# Altium PCB MJE13001_SWITCHING_WITH_FEEDBACK_V2.PcbDoc
Units mil, origin at the board's own origin, x right, y up, seen from the top; angles counter-clockwise.
Board outline 2175 x 1150 mil, 2 copper layers (Top Layer, Bottom Layer); 21 components, 14 nets, 45 pads, 0 vias.
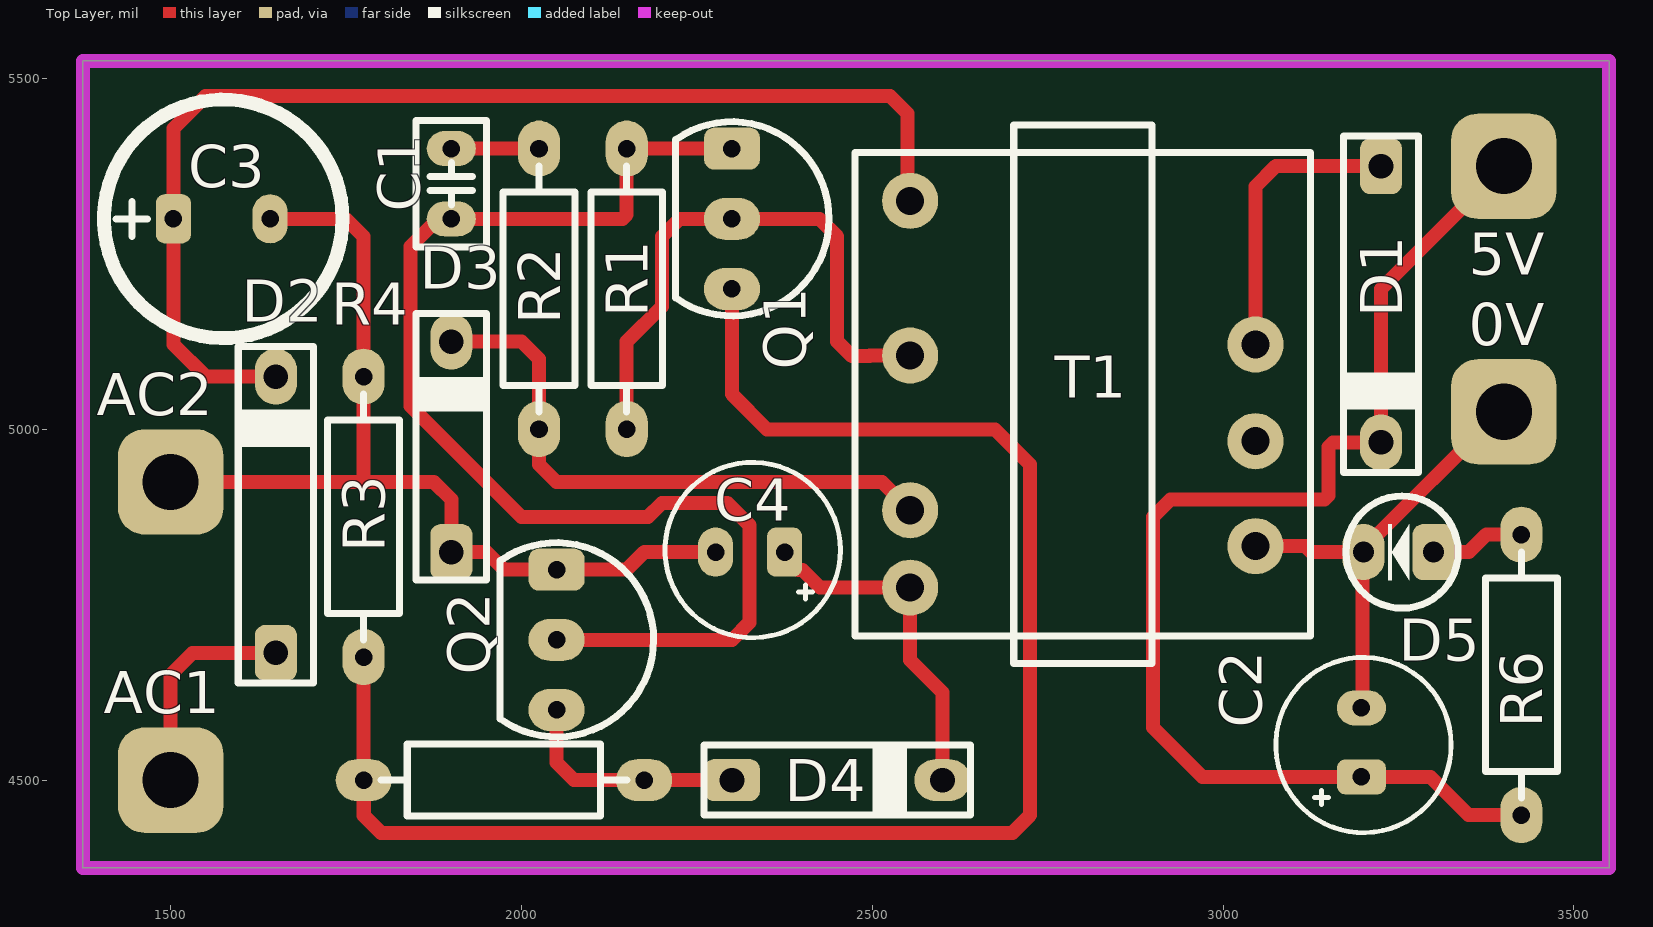
[diagram p0: Top Layer view]
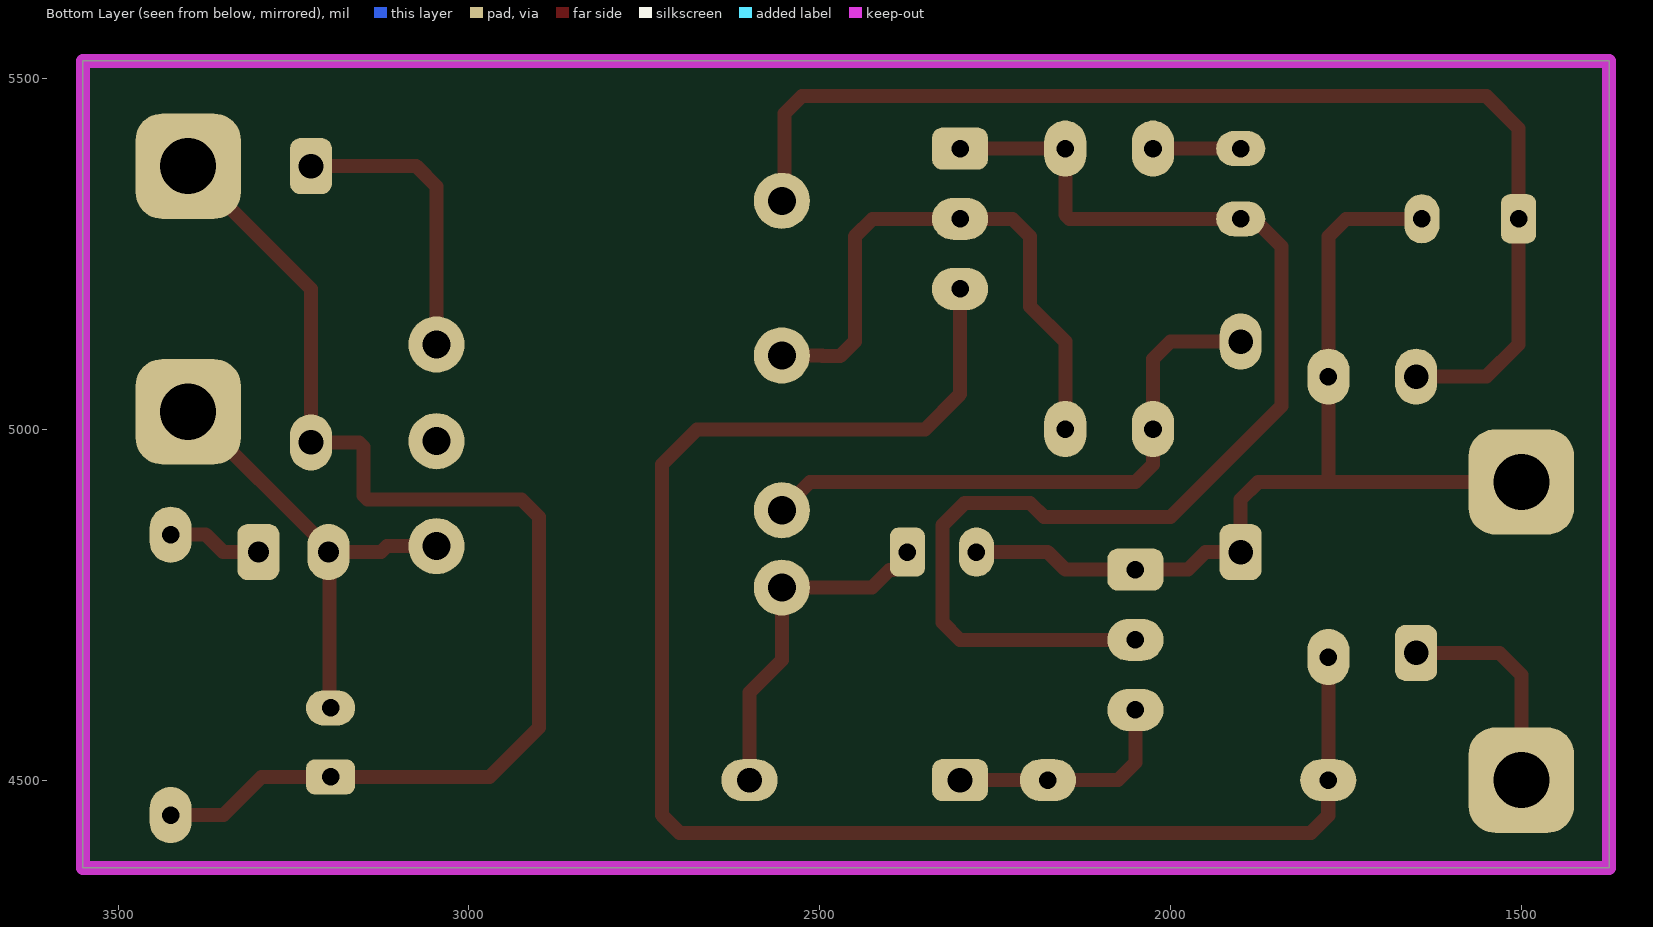
[diagram p1: Bottom Layer view, seen from below]
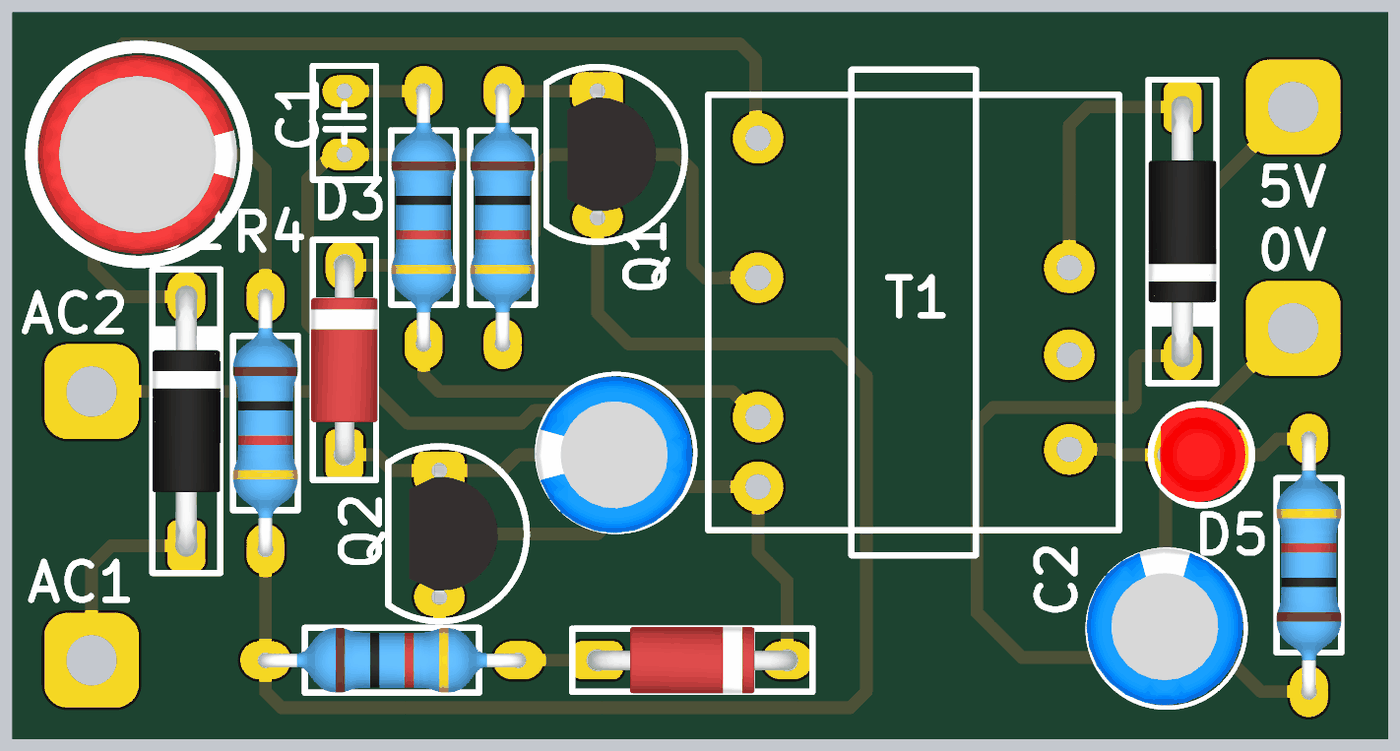
[diagram p2: 3D render of the assembled board from above, using the file's embedded part models]

## Layer stack, top to bottom
Top Solder: solder mask 0.4, Solder Resist, Dk 3.5
Top Layer: signal copper 1.4
Dielectric 1: dielectric 12.6, FR-4, Dk 4.8
Bottom Layer: signal copper 1.4
Bottom Solder: solder mask 0.4, Solder Resist, Dk 3.5

## Board outline
1375,4375 1375,5525 3550,5525 3550,4375

## Design rules (kind name [scope] priority, off if disabled: settings)
Clearance [All] p1: gap=10 ignorepadtopadclearanceinfootprint=FALSE except(0: Arc-Hole Track-Hole SMDPad-Hole THPad-Hole Via-Hole Fill-Hole Poly-Hole Region-Hole Text-Hole)
PolygonConnect [All] p1: connectstyle=Relief reliefconductorwidth=10 reliefentries=4 polygonreliefangle="90 Angle" airgapwidth=10
RoutingVias [All] p1: holewidth=28 width=50 viastyle="Through Hole" minholewidth=28 minwidth=50 maxholewidth=28 maxwidth=50
SolderMaskExpansion [All] p1: expansion=4 istentingtop=FALSE
Width [All] p1: maxlimit=50 minlimit=10 preferedwidth=20
30 further rules are at their usual default settings.

## Components (designator, comment, footprint, x,y, rotation, side; value= is the part's Value field where it differs from the comment)
0V "SolderPoint" SolderPoint 3400,5025 r0 top
5V "SolderPoint" SolderPoint 3400,5375 r90 top
AC1 "SolderPoint" SolderPoint 1500,4500 r0 top
AC2 "SolderPoint" SolderPoint 1500,4925 r0 top
C1 "472" CAP_Ceramic_Disc_2 1900,5350 r90 top
C2 "100uF" CAP_RAD_2.5mm 3200,4550 r90 top
C3 "2.2uF/400V" CAP_RAD_3.5mm 1575,5300 r0 top
C4 "4.7uF" CAP_RAD_2.5mm 2329.53,4827.95 r180 top
D1 "1N5819" DO-41 3225,5178.15 r270 top
D2 "1N4007" DO-41 1650,4878.15 r90 top
D3 "1N4148" "DO-35 Horizontal" 1900,4975 r90 top
D4 "4V7" "DO-35 Horizontal" 2450,4500 r0 top
D5 "LED" LED_3MM_RED 3250,4825 r180 top
Q1 "13001" TO-92 2300,5300 r270 top
Q2 "C945" TO-92 2050,4700 r270 top
R1 "3M9" RES-0.25W-H-MF 2150,5200.2 r270 top
R2 "300R" RES-0.25W-H-MF 2025,5200.2 r270 top
R3 "680" RES-0.25W-H-MF 1975,4500 r0 top
R4 "10" RES-0.25W-H-MF 1775,4875.2 r270 top
R6 "220R" RES-0.25W-H-MF 3425,4650 r90 top
T1 "Trans-EE19A-2.1" TRANS_EE19A-2.1 2800,5050 r90 top

## Footprints (in the part's own frame and the unit in brackets; to place one, negate y for a bottom-side part, rotate by r counter-clockwise, add the part's x,y. Pads: shape width x height; smd on the part's side, far side on the other; paste and mask are expansions set on the pad)
CAP_Ceramic_Disc_2 [mil]
  oval 50x70 hole 25: 1(-50,0) 2(50,0)
  silkscreen extent -90,-50 90,50, body extent -92,-49 92,49, height 289
CAP_RAD_2.5mm [mm]
  rrect50% 1.27x1.778 hole 0.635: 1(-1.155,0.075)
  oval 1.27x1.778 hole 0.635: 2(1.345,0.075)
  silkscreen extent -3.17,-3.17 3.17,3.17, body extent -3.07,-3.07 3.23,3.23, height 11.02
CAP_RAD_3.5mm [mil]
  rrect50% 50x70 hole 25: 1(-71.06,0)
  oval 50x70 hole 25: 2(66.73,0)
  silkscreen extent -170,-170 170,170, body extent -160,-157 155,157, height 446
"DO-35 Horizontal" [mil]
  rrect50% 80x60 hole 35: 1(-150,0)
  oval 80x60 hole 35: 2(150,0)
  silkscreen extent -190,-50 190,50, body extent -165,-52 166,53, height 112
DO-41 [mil]
  rrect50% 80x60 hole 35: 1(-196.85,0)
  oval 80x60 hole 35: 2(196.85,0)
  silkscreen extent -240,-54 240,54, body extent -214,-54 214,54, height 132
LED_3MM_RED [mil]
  rrect50% 60x80 hole 30: 1(-50,0)
  oval 60x80 hole 30: 2(50,0)
  silkscreen extent -85,-80 75,80, body extent -75,-75 60,75, height 223
RES-0.25W-H-MF [mil]
  oval 80x60 hole 25: 1(-199.8,0) 2(199.8,0.01)
  silkscreen extent -175,-51 175,51, body extent -211,-51 211,51, height 106
SolderPoint [mil]
  rrect50% 150x150 hole 80: 1(0,0)
TO-92 [mil]
  rrect50% 60x80 hole 25: 1(-100,0)
  oval 60x80 hole 25: 2(0,0) 3(100,0)
  silkscreen extent -138,-81 138,138, body extent -109,-48 109,93, height 298
TRANS_EE19A-2.1 [mil]
  round 80 hole 40: 1(-275.59,246.06) 2(-165.35,246.06) 4(55.12,246.06) 6(275.59,246.06) 7(70.87,-246.06) 8(-66.93,-246.06) 9(-216.54,-246.06)
  silkscreen extent -384,-325 384,325

## Part data
C1: library part Capacitors(Disc)
C2 C3 C4: library part Capacitor(Radian)
D1: library part 1N4937
D3: library part "Diode 1N4148"
D4: library part "Diode Zener"
D5: library part "LED 3MM"
Q1: library part MJE13001_Type_F
R1 R2 R3 R4 R6: library part "Resistors THD"

## Nets (pads, with @x,y where several pads share a name; then routed paths per layer and width w, separated by ;. In a path a pad name is that pad's centre, name@x,y a point inside that pad or via, vN(x,y) a via of type N, cw(c..) or ccw(c..) an arc to the next point about the centre after c; other vN are vias at no path point)
Net0V_1: 0V.1 C2.2 D5.2 T1.9 | length 666.5
  Top Layer w20: T1.9 3116.54,4833.46 3125,4825 D5.2 ; C2.2 3198.52,4604.43 3198.52,4823.52 D5.2 ; 0V.1 3395,5025 3200,4830 D5.2
Net5V_1: 5V.1 C2.1 D1.2 R6.1 | length 1752.4
  Top Layer w20: 5V.1 3225,5200 D1.2 3156.3,4981.3 3150,4975 3150,4905.86 3144.14,4900 2925,4900 2900,4875 2900,4575 2970.47,4504.53 C2.1 3295.47,4504.53 3349.8,4450.2 R6.1
NetAC1_1: AC1.1 D2.1 | length 313
  Top Layer w20: AC1.1 1500,4650 1531.3,4681.3 D2.1
NetAC2_1: AC2.1 C3.2 C4.2 D3.1 Q2.1 R4.1 | length 1376.3
  Top Layer w20: AC2.1 1775,4925 ; C3.2 1750,5300 1775,5275 R4.1 1775,4925 ; C4.2 2175,4825 2150,4800 Q2.1 1975,4800 1950,4825 D3.1 1900,4900 1875,4925 1775,4925
NetC1_1: C1.1 Q1.1 Q2.2 R1.1 | length 1792.7
  Top Layer w20: Q2.2 2300,4700 2325,4725 2325,4863.28 2293.28,4895 2200,4895 2180,4875 2000,4875 1841.57,5033.43 1841.57,5260.83 1880.74,5300 C1.1 2144.14,5300 2150,5305.86 R1.1 Q1.1
NetC1_2: C1.2 R2.1 | length 125
  Top Layer w20: C1.2 R2.1
NetC3_1: C3.1 D2.2 T1.6 | length 1674.6
  Top Layer w20: D2.2 1550,5075 1503.94,5121.06 C3.1 1503.94,5428.94 1550,5475 2525,5475 2550,5450 2550,5329.53 T1.6
NetC4_1: C4.1 D4.2 T1.1 | length 496.9
  Top Layer w20: C4.1 2375,4819.06 2394.43,4799.63 2400.37,4799.63 2425.59,4774.41 T1.1 2553.94,4671.06 2600,4625 D4.2
NetD1_1: D1.1 T1.7 | length 416.1
  Top Layer w20: T1.7 3046.06,5346.06 3075,5375 D1.1
NetD3_2: D3.2 R2.2 T1.2 | length 841.4
  Top Layer w20: D3.2 2000,5125 2025.01,5099.99 R2.2 2025.01,4949.99 2050,4925 2513.58,4925 T1.2
NetD4_1: D4.1 Q2.3 R3.2 | length 335.4
  Top Layer w20: Q2.3 2050,4525 2074.99,4500.01 R3.2 D4.1
NetD5_1: D5.1 R6.2 | length 135.4
  Top Layer w20: D5.1 3350,4825 3375,4850 3424.8,4850 R6.2
NetQ1_2: Q1.2 R1.2 T1.4 | length 829
  Top Layer w20: R1.2 2150,5125 2200,5175 2200,5275 2225,5300 Q1.2 2425,5300 2450,5275 2450,5125 2470.86,5104.14 2495.74,5104.14 2496.72,5105.12 T1.4
NetQ1_3: Q1.3 R3.1 R4.2 | length 2312.5
  Top Layer w20: R4.2 1775.1,4675.3 1775.1,4500.1 R3.1 1775.2,4449.8 1800,4425 2700,4425 2725,4450 2725,4950 2675,5000 2350,5000 2300,5050 Q1.3
pads on no net: T1.8

## Keep-outs
Keep-Out Layer:
  the board outline again, w20